# EAGLE board usbmc (EAGLE 4.16)
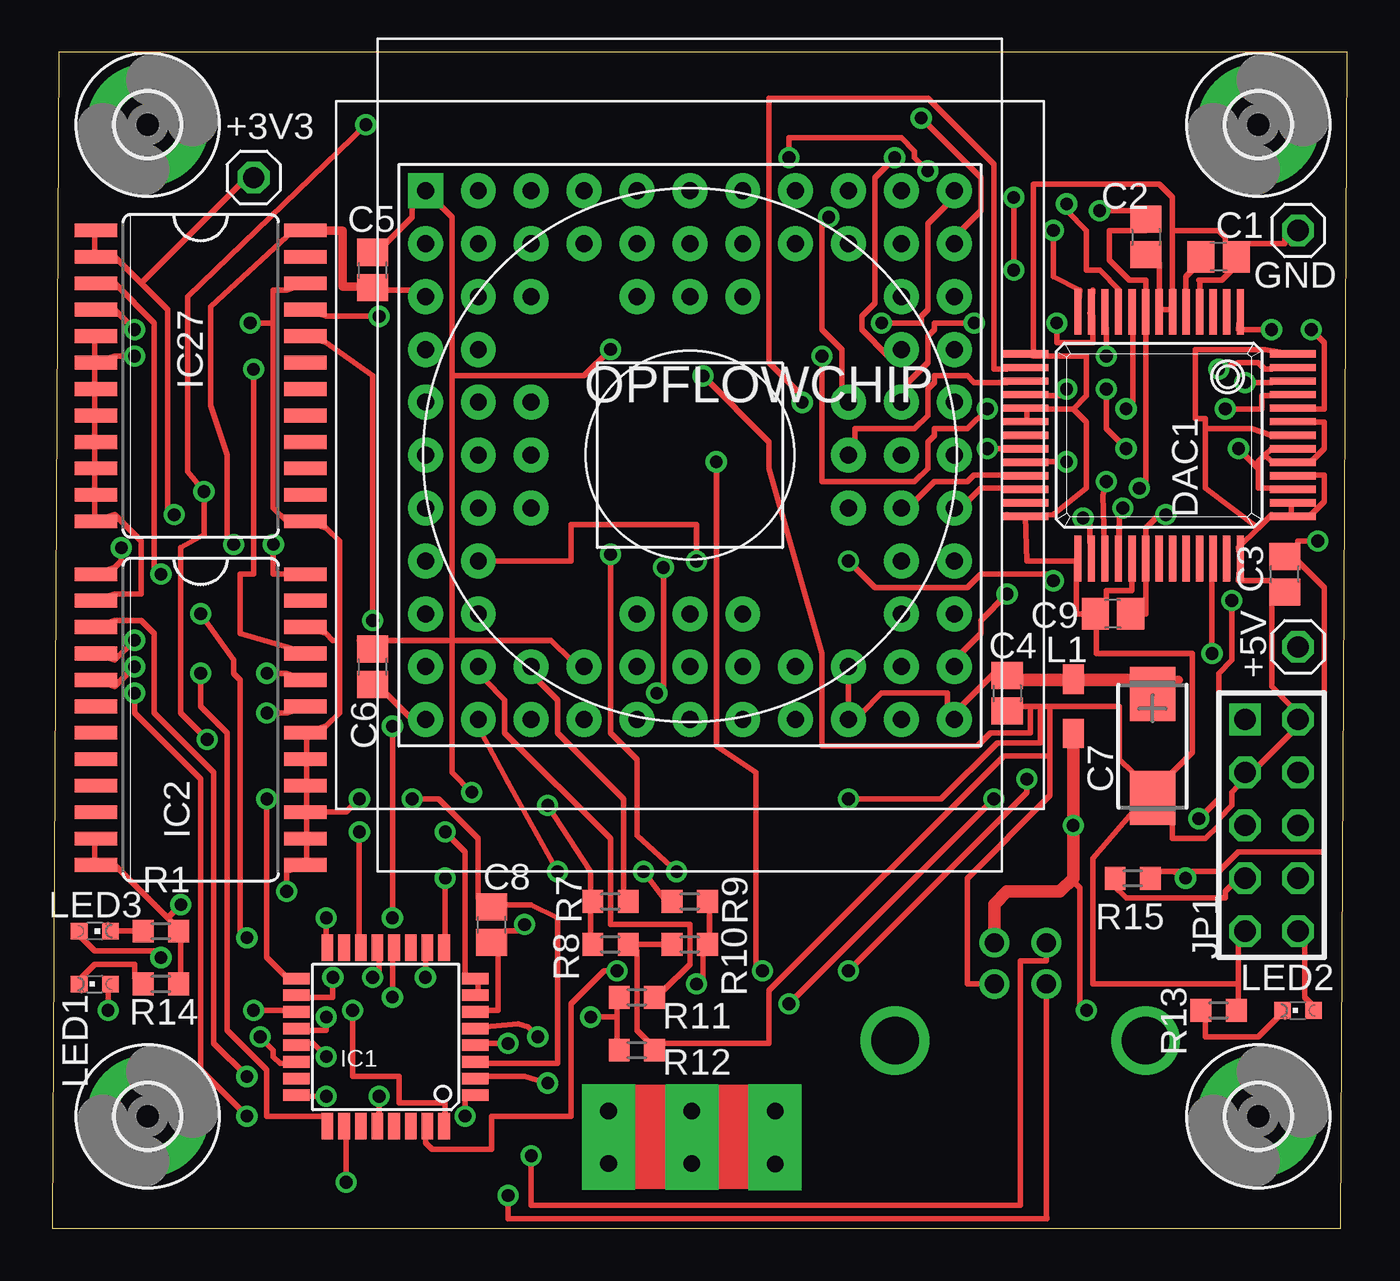
[diagram p0: board, top side]
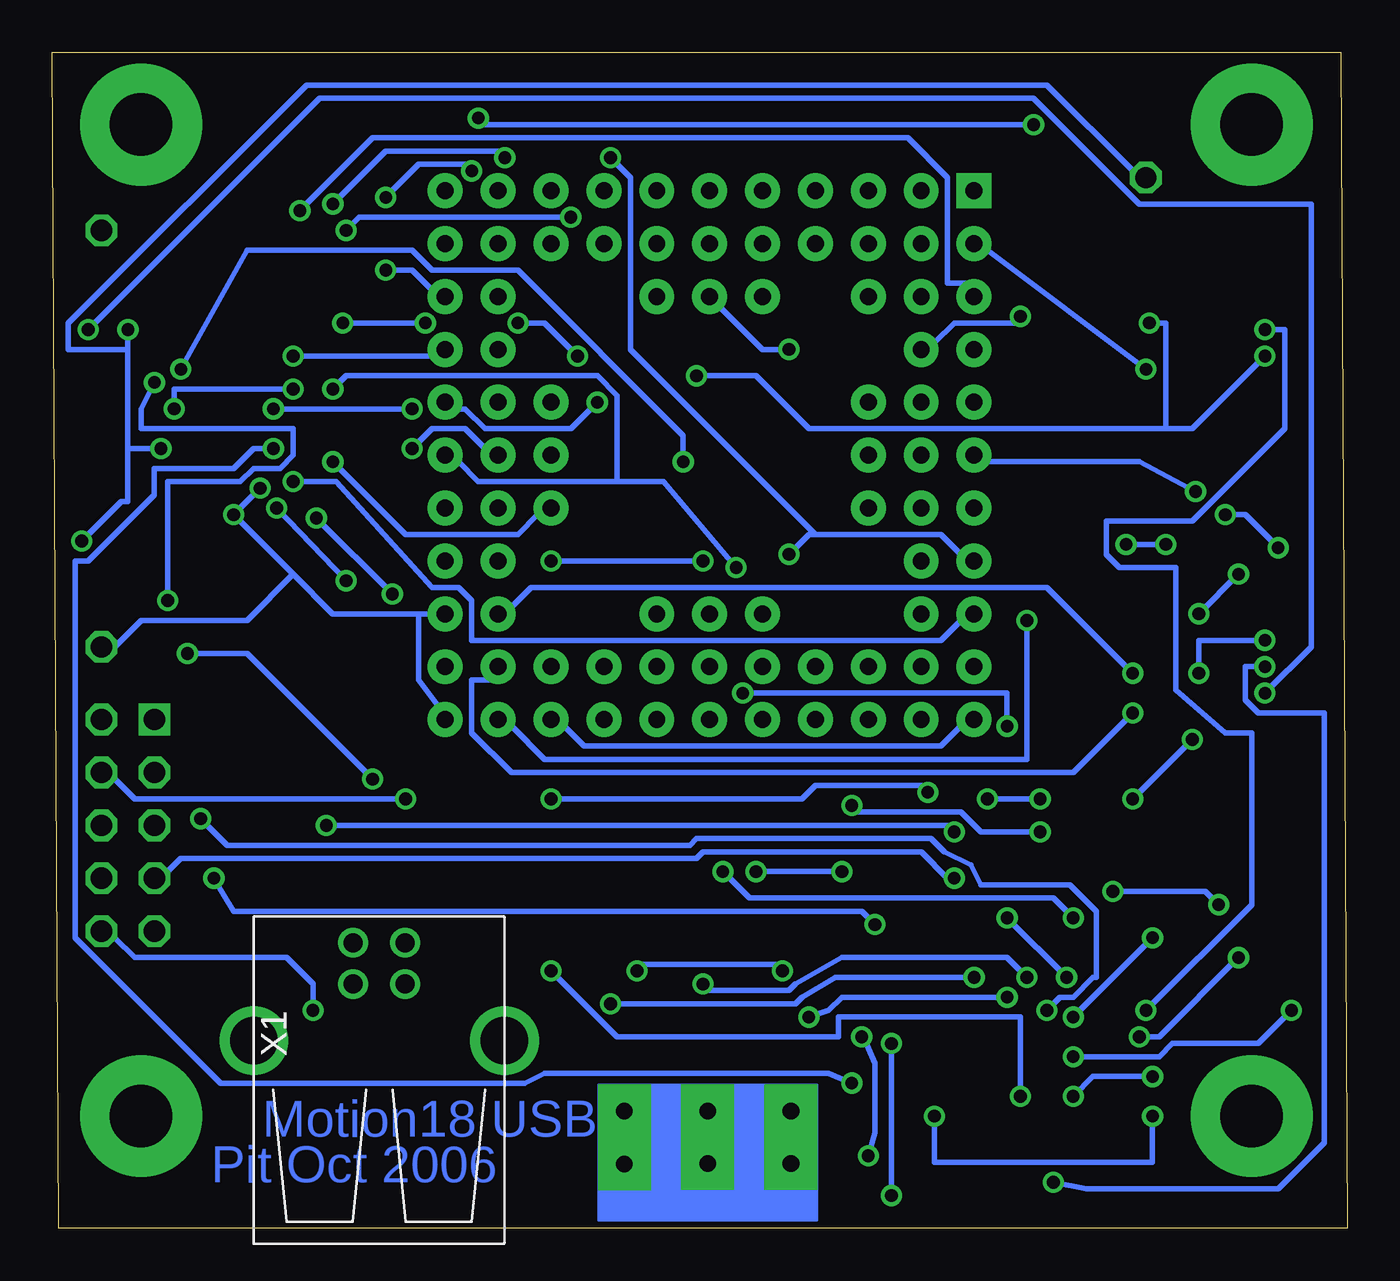
[diagram p1: board, bottom side, seen from below]

Size 62.22 x 56.51 mm. Coordinates in mm from the lower left corner, seen from the top.
Outline: 0,0 61.9,0 62.22,56.51 0.32,56.51 0,0
Copper layers (1*16): Top 0.035mm / dielectric 1.5mm / Bottom 0.035mm
Design rules "default": minimum track width 10mil, minimum drill 24mil, track to track 8mil, track to pad 8mil, pad to pad 8mil, via to via 8mil, smd to smd 8mil, copper to edge 40mil, drill to drill 8mil, minimum pad ring 10mil, minimum via ring 8mil, stop-mask expansion 4mil, vias tented up to drill 0mil, thermal gap 10mil
Net classes: 1 supply: width 0.203 mm, drill 0.152 mm

## Footprints (pad centres in the part's own frame; a part is rotated, then mirrored left to right if it is on the bottom)
1X01 = drill 1.016 octagon: 1 0,0
C0805 = smd 1.3 x 1.5: 1 -0.85,0; 2 0.85,0
CT6032 = smd 2.6 x 2.2: + 2.5,0; - -2.5,0
QFP-52 = smd 0.35 x 2.2: 1 -3.575,-6.25; 2 -2.925,-6.25; 3 -2.275,-6.25; 4 -1.625,-6.25; 5 -0.975,-6.25; 6 -0.325,-6.25; 7 0.325,-6.25; 8 0.975,-6.25; 9 1.625,-6.25; 10 2.275,-6.25; 11 2.925,-6.25; 12 3.575,-6.25; 13 4.225,-6.25; 27 4.225,5.6; 28 3.575,5.6; 29 2.925,5.6; 30 2.275,5.6; 31 1.625,5.6; 32 0.975,5.6; 33 0.325,5.6; 34 -0.325,5.6; 35 -0.975,5.6; 36 -1.625,5.6; 37 -2.275,5.6; 38 -2.925,5.6; 39 -3.575,5.6 | smd 2.2 x 0.35: 14 6.75,-4.225; 15 6.75,-3.575; 16 6.75,-2.925; 17 6.75,-2.275; 18 6.75,-1.625; 19 6.75,-0.975; 20 6.75,-0.325; 21 6.75,0.325; 22 6.75,0.975; 23 6.75,1.625; 24 6.75,2.275; 25 6.75,2.925; 26 6.75,3.575; 40 -6.1,3.575; 41 -6.1,2.925; 42 -6.1,2.275; 43 -6.1,1.625; 44 -6.1,0.975; 45 -6.1,0.325; 46 -6.1,-0.325; 47 -6.1,-0.975; 48 -6.1,-1.625; 49 -6.1,-2.275; 50 -6.1,-2.925; 51 -6.1,-3.575; 52 -6.1,-4.225
3,0-PAD = drill 3 pad 5.842 round: B3,0 0,0
TQFP32-08 = smd 1.27 x 0.559: 1 -4.293,2.8; 2 -4.293,2; 3 -4.293,1.2; 4 -4.293,0.4; 5 -4.293,-0.4; 6 -4.293,-1.2; 7 -4.293,-2; 8 -4.293,-2.8; 17 4.293,-2.8; 18 4.293,-2; 19 4.293,-1.2; 20 4.293,-0.4; 21 4.293,0.4; 22 4.293,1.2; 23 4.293,2; 24 4.293,2.8 | smd 0.559 x 1.27: 9 -2.8,-4.293; 10 -2,-4.293; 11 -1.2,-4.293; 12 -0.4,-4.293; 13 0.4,-4.293; 14 1.2,-4.293; 15 2,-4.293; 16 2.8,-4.293; 25 2.8,4.293; 26 2,4.293; 27 1.2,4.293; 28 0.4,4.293; 29 -0.4,4.293; 30 -1.2,4.293; 31 -2,4.293; 32 -2.8,4.293
SO24W = smd 0.66 x 2.032: 1 -6.985,-5.029; 2 -5.715,-5.029; 3 -4.445,-5.029; 4 -3.175,-5.029; 5 -1.905,-5.029; 6 -0.635,-5.029; 7 0.635,-5.029; 8 1.905,-5.029; 9 3.175,-5.029; 10 4.445,-5.029; 11 5.715,-5.029; 12 6.985,-5.029; 13 6.985,5.029; 14 5.715,5.029; 15 4.445,5.029; 16 3.175,5.029; 17 1.905,5.029; 18 0.635,5.029; 19 -0.635,5.029; 20 -1.905,5.029; 21 -3.175,5.029; 22 -4.445,5.029; 23 -5.715,5.029; 24 -6.985,5.029
AVR-JTAG-10 = drill 1.016 square: 1 -5.08,-1.27 | drill 1.016 octagon: 2 -5.08,1.27; 3 -2.54,-1.27; 4 -2.54,1.27; 5 0,-1.27; 6 0,1.27; 7 2.54,-1.27; 8 2.54,1.27; 9 5.08,-1.27; 10 5.08,1.27
L0805 = smd 1.4 x 1: 1 -1.3,0; 2 1.3,0
CHIPLED_0603 = smd 0.8 x 0.8: A 0,-0.75; C 0,0.75
PGA84 = drill 0.813 pad 1.676 square: A01 -12.7,12.7 | drill 0.813 pad 1.676 round: A02 -10.16,12.7; A03 -7.62,12.7; A04 -5.08,12.7; A05 -2.54,12.7; A06 0,12.7; A07 2.54,12.7; A08 5.08,12.7; A09 7.62,12.7; A10 10.16,12.7; A11 12.7,12.7; B01 -12.7,10.16; B02 -10.16,10.16; B03 -7.62,10.16; B04 -5.08,10.16; B05 -2.54,10.16; B06 0,10.16; B07 2.54,10.16; B08 5.08,10.16; B09 7.62,10.16; B10 10.16,10.16; B11 12.7,10.16; C01 -12.7,7.62; C02 -10.16,7.62; C03 -7.62,7.62; C05 -2.54,7.62; C06 0,7.62; C07 2.54,7.62; C10 10.16,7.62; C11 12.7,7.62; D01 -12.7,5.08; D02 -10.16,5.08; D10 10.16,5.08; D11 12.7,5.08; E01 -12.7,2.54; E02 -10.16,2.54; E03 -7.62,2.54; E09 7.62,2.54; E10 10.16,2.54; E11 12.7,2.54; F01 -12.7,0; F02 -10.16,0; F03 -7.62,0; F09 7.62,0; F10 10.16,0; F11 12.7,0; G01 -12.7,-2.54; G02 -10.16,-2.54; G03 -7.62,-2.54; G09 7.62,-2.54; G10 10.16,-2.54; G11 12.7,-2.54; H01 -12.7,-5.08; H02 -10.16,-5.08; H10 10.16,-5.08; H11 12.7,-5.08; J01 -12.7,-7.62; J02 -10.16,-7.62; J06 -2.54,-7.62; J07 0,-7.62; J08 2.54,-7.62; J10 10.16,-7.62; J11 12.7,-7.62; K01 -12.7,-10.16; K02 -10.16,-10.16; K03 -7.62,-10.16; K04 -5.08,-10.16; K05 -2.54,-10.16; K06 0,-10.16; K07 2.54,-10.16; K08 5.08,-10.16; K09 7.62,-10.16; K10 10.16,-10.16; K11 12.7,-10.16; L01 -12.7,-12.7; L02 -10.16,-12.7; L03 -7.62,-12.7; L04 -5.08,-12.7; L05 -2.54,-12.7; L06 0,-12.7; L07 2.54,-12.7; L08 5.08,-12.7; L09 7.62,-12.7; L10 10.16,-12.7; L11 12.7,-12.7
R0603 = smd 1 x 1.1: 1 -0.85,0; 2 0.85,0
NUT__PAD3 = drill 0.8 pad 2.54 square: P$1 -2,2; P$2 -2,-0.53; P$3 2,2; P$4 2,-0.53; P$5 6,2; P$6 6,-0.55
USB-B-H = drill 0.914 round: D+ 0,1.25; D- 1.981,1.25; GND 0,-1.25; VBUS 1.981,-1.25 | drill 2.286 round: P$1 -2.718,-6.02; P$2 -2.718,6.02

## Placement (x,y rotation side)
+3V3  [1X01]  9.68,50.48 0 top
+5V  [1X01]  59.84,27.93 0 top
C1  100nF  [C0805]  56.03,46.67 180 top
C2  100nF  [C0805]  52.54,47.62 270 top
C3  100nF  [C0805]  59.21,31.43 90 top
C4  100nF  [C0805]  45.87,25.71 270 top
C5  100nF  [C0805]  15.39,46.03 270 top
C6  100nF  [C0805]  15.39,26.98 270 top
C7  10uF  [CT6032]  52.86,23.17 90 top
C8  100nF  [C0805]  21.11,14.6 270 top
C9  100nF  [C0805]  50.95,29.52 180 top
DAC1  AD5391BSTBST  [QFP-52]  53.49,37.78 180 top
GND  [1X01]  59.84,47.94 0 top
H1  MOUNT-PAD-ROUND3.0  [3,0-PAD]  4.6,5.39 0 top
H2  MOUNT-PAD-ROUND3.0  [3,0-PAD]  4.6,53.02 0 top
H3  MOUNT-PAD-ROUND3.0  [3,0-PAD]  57.94,53.02 0 top
H4  MOUNT-PAD-ROUND3.0  [3,0-PAD]  57.94,5.39 0 top
IC1  C8051F320  [TQFP32-08]  16.03,9.2 180 top
IC2  74LVXC3245  [SO24W]  7.14,24.44 270 top
IC27  74LVXC3245  [SO24W]  7.14,40.95 270 top
JP1  AVR-JTAG-10  [AVR-JTAG-10]  58.57,19.36 270 top
L1  330Z  [L0805]  49.05,25.08 90 top
LED1  red  [CHIPLED_0603]  2.06,11.74 90 top
LED2  red  [CHIPLED_0603]  59.84,10.47 90 top
LED3  red  [CHIPLED_0603]  2.06,14.28 270 top
OPFLOWCHIP  MOTION18PGA84  [PGA84]  30.63,37.14 0 top
R1  180R  [R0603]  5.23,14.28 0 top
R7  4.7k  [R0603]  26.82,15.71 0 top
R8  4.7k  [R0603]  26.82,13.65 180 top
R9  4.7k  [R0603]  30.63,15.71 180 top
R10  4.7k  [R0603]  30.63,13.65 0 top
R11  4.7k  [R0603]  28.09,11.11 0 top
R12  4.7k  [R0603]  28.09,8.57 180 top
R13  270R  [R0603]  56.03,10.47 0 top
R14  180R  [R0603]  5.23,11.74 0 top
R15  1k  [R0603]  51.91,16.82 180 top
U$2  LENSMOUNTS  [LENSMOUNTS]  30.63,37.14 0 top
U$3  NUTPAD3  [NUT__PAD3]  28.73,3.65 0 top
X1  USB-B-H  [USB-B-H]  46.51,11.74 90 bottom

## Library data of the parts
+3V3 +5V GND = pinhead
C1-C9 R1 R7-R15 = rcl
DAC1 JP1 U$2 U$3 = usbmc
H1-H4 = holes
IC1 = silabs-2
IC2 IC27 = gd_transceiver
L1 = MoNC
LED1-LED3 = led
OPFLOWCHIP = alanLib
X1 = con-usb

## Nets
+3V3: +3V3.1 C3.2 C8.2 DAC1.1 DAC1.42 DAC1.44 DAC1.45 DAC1.47 IC1.6 IC2.1 IC27.1 IC27.2 R15.1
+5V: +5V.1 C2.1 C4.1 C5.2 C6.2 C7.+ C9.1 DAC1.8 DAC1.32 IC2.24 IC27.24 L1.2 OPFLOWCHIP.C01 OPFLOWCHIP.J11 OPFLOWCHIP.K09 OPFLOWCHIP.L01 OPFLOWCHIP.L09 OPFLOWCHIP.L11
B+: IC1.4 X1.D+
B-: IC1.5 X1.D-
CLK_H: IC27.20 OPFLOWCHIP.L10
CLK_H33: IC1.19 IC27.4
CLK_V: IC27.21 OPFLOWCHIP.D02
CLK_V33: IC1.20 IC27.3
FBIAS: DAC1.9 OPFLOWCHIP.A11
GND: C1.1 C2.2 C3.1 C4.2 C5.1 C6.1 C7.- C8.1 C9.2 DAC1.4 DAC1.6 DAC1.7 DAC1.14 DAC1.18 DAC1.19 DAC1.26 DAC1.27 DAC1.31 DAC1.39 DAC1.40 DAC1.41 DAC1.43 DAC1.46 DAC1.52 GND.1 IC1.3 IC2.2 IC2.11 IC2.12 IC2.13 IC2.14 IC2.15 IC2.16 IC2.17 IC2.18 IC2.22 IC27.5 IC27.6 IC27.7 IC27.8 IC27.9 IC27.10 IC27.11 IC27.12 IC27.13 IC27.22 JP1.2 JP1.3 JP1.9 OPFLOWCHIP.A01 OPFLOWCHIP.C06 OPFLOWCHIP.K04 R1.2 R8.1 R10.1 R12.1 R13.2 R14.2 X1.GND
HDBIAS: DAC1.16 OPFLOWCHIP.F09
HDT+: DAC1.10 OPFLOWCHIP.D10
HDT-: DAC1.11 OPFLOWCHIP.D11
HRES: DAC1.21 OPFLOWCHIP.F10
HSYNC: IC2.19 OPFLOWCHIP.K10
HSYNC33: IC1.26 IC2.5
MISO: DAC1.48 IC1.1
MOSI: DAC1.50 IC1.32
N$1: IC1.14 R7.1 R8.2
N$2: IC1.13 R9.1 R10.2
N$3: IC1.12 R11.1 R12.2
N$5: LED3.C R1.1
N$7: IC1.22 LED3.A
N$8: IC1.21 LED1.A
N$9: LED2.C R13.1
N$10: IC1.10 JP1.4
N$11: IC1.9 JP1.7 R15.2
N$42: LED1.C R14.1
NOTRESET: DAC1.37 IC1.28
NSCFBIAS: DAC1.28 OPFLOWCHIP.K11
NSS: DAC1.51 IC1.31
OPBIAS: DAC1.23 OPFLOWCHIP.G10
OR_H: IC2.20 OPFLOWCHIP.J10
OR_H33: IC1.25 IC2.4
PDBIAS: DAC1.30 OPFLOWCHIP.H02
PHABIAS: DAC1.12 OPFLOWCHIP.E10
PHBIAS: DAC1.13 OPFLOWCHIP.E09
PHFBIAS: DAC1.15 OPFLOWCHIP.E11
PSCFBIAS: DAC1.29 OPFLOWCHIP.J01
REF: C1.2 DAC1.5
S_PH0: OPFLOWCHIP.L02 R9.2
S_VX+: OPFLOWCHIP.K03 R7.2
S_VY+: OPFLOWCHIP.K02 R11.2
SCK: DAC1.49 IC1.2
V-: DAC1.17 IC1.18 OPFLOWCHIP.F11
VSYNC: IC2.21 OPFLOWCHIP.B01
VSYNC33: IC1.24 IC2.3
VUSB: IC1.7 IC1.8 JP1.10 L1.1 LED2.A X1.VBUS
VVI1: DAC1.24 OPFLOWCHIP.G11
VVI2: DAC1.22 OPFLOWCHIP.G09
VX+B: IC1.17 OPFLOWCHIP.B11 OPFLOWCHIP.F01
VY+B: IC1.16 OPFLOWCHIP.C11 OPFLOWCHIP.H01

## Tracks (layer width: path | path; a pad name or v marks a point on that pad's centre or on a via)
+3V3  (via drill 0.61)
  Top 0.254: v3.33,32.7 3.33,32.06 3.01,31.75 IC2.1 | v5.87,34.29 5.55,34.6 5.55,44.13 4.28,45.4 | 4.28,45.4 3.01,46.67 IC27.2 2.06,46.99 2.06,47.62 IC27.1 | 4.28,45.4 9.04,50.16 +3V3.1 | 57.94,36.51 57.94,36.82 58.26,37.14 | 57.94,36.51 57.94,35.56 58.57,35.56 DAC1.42 | 58.26,37.14 58.57,37.46 DAC1.45 | 58.26,37.14 58.57,36.82 DAC1.44 60.48,36.82 61.11,37.46 61.11,38.73 60.48,38.73 DAC1.47 | v58.57,43.18 56.98,43.18 DAC1.1 | v56.98,37.46 57.94,36.51 | IC1.6 20.79,10.47 21.43,10.47 21.43,13.33 C8.2 21.74,14.28 22.69,14.28 v22.69,14.6 | 53.81,17.14 56.03,17.14 56.98,18.09 61.11,18.09 61.11,30.79 59.84,32.06 C3.2 59.84,32.7 59.84,33.01 v60.8,33.01 | 53.81,17.14 52.86,17.14 R15.1 | v54.44,16.82 53.81,17.14
  Bottom 0.254: v3.33,32.7 4.91,34.29 v5.87,34.29 | 58.57,37.46 58.57,42.22 | 58.57,42.22 v58.57,43.18 | 58.57,37.46 v56.98,37.46 | v22.69,14.6 23.33,15.23 53.49,15.23 v54.44,16.82 | 58.57,37.46 58.57,34.92 58.89,34.92 v60.8,33.01 | 58.57,42.22 61.43,42.22 61.43,43.49 50,54.92 14.44,54.92 10.31,50.79 +3V3.1
+5V  (via drill 0.61)
  Top 0.254: OPFLOWCHIP.K09 OPFLOWCHIP.L09 38.89,24.76 39.84,25.71 43.02,25.71 43.02,25.08 OPFLOWCHIP.L11 43.65,25.08 45.24,26.67 C4.1 | v53.49,34.29 53.17,34.29 52.54,33.65 52.54,33.01 DAC1.32 52.52,32.2 52.54,32.22 52.54,29.52 C9.1 | v52.22,35.56 52.54,35.87 52.54,43.18 DAC1.8 52.52,43.99 52.54,43.97 52.54,45.56 51.75,45.56 50.79,46.51 50.79,47.94 52.54,47.94 C2.1 51.91,48.89 v50.32,48.89 | OPFLOWCHIP.L01 17.3,24.44 16.03,25.71 C6.2 16.03,26.67 | C5.2 16.03,45.08 17.3,45.08 OPFLOWCHIP.C01 | IC2.24 10.63,31.43 v10.63,32.86 | v8.72,32.86 8.41,33.17 8.41,37.14 7.61,39.52 7.61,44.29 11.58,47.94 12.22,47.94
  Top 0.406: 52.86,26.35 54.13,26.35 | IC27.24 12.22,47.94 13.96,47.94 13.96,45.24 15.39,45.24 | 15.39,45.24 C5.2 | 15.39,45.24 15.39,45.4
  Top 0.61: 49.05,26.35 52.86,26.35 C7.+ | C4.1 45.87,26.35 49.05,26.35 | 49.05,26.35 L1.2
  Bottom 0.254: 50.63,31.43 48.73,29.52 44.6,29.52 | 50.63,31.43 v53.49,34.29 v52.22,35.56 | 44.6,29.52 OPFLOWCHIP.J11 | 50.63,31.43 52.86,29.21 57.94,29.21 59.21,27.93 +5V.1 | OPFLOWCHIP.L11 43.65,25.08 44.6,26.35 44.6,29.52 | v50.32,48.89 46.83,52.38 21.11,52.38 19.2,50.48 19.2,45.4 18.25,45.4 OPFLOWCHIP.C01 | OPFLOWCHIP.L09 37.62,24.12 36.66,23.17 19.52,23.17 18.57,24.12 OPFLOWCHIP.L01 | v8.72,32.86 v10.63,32.86
B+  (via drill 0.61)
  Top 0.254: v21.9,8.89 19.84,8.89 IC1.4 | X1.D+ 47.76,0.65 47.78,0.47 21.9,0.47 v21.9,1.58
  Bottom 0.254: v21.9,1.58 v21.9,8.89
B-  (via drill 0.61)
  Top 0.254: 20.79,9.52 IC1.5 20.8,9.68 | X1.D- 47.76,12.85 46.51,12.85 46.51,1.11 23.01,1.11 v23.01,3.49 | 20.8,9.68 20.47,9.52 | v23.33,9.2 22.85,9.68 22.38,9.84 20.8,9.68
  Bottom 0.254: v23.01,3.49 22.69,4.6 22.69,7.93 23.33,9.36 v23.33,9.2
CLK_H  (via drill 0.61)
  Top 0.254: v15.39,29.21 15.39,40.95 13.17,42.54 IC27.20
  Bottom 0.254: v15.39,29.21 15.39,22.54 38.57,22.54 40.16,24.12 OPFLOWCHIP.L10
CLK_H33  (via drill 0.61)
  Top 0.254: v9.68,10.47 11.27,10.47 IC1.19 | v3.96,43.18 3.01,44.13 IC27.4
  Bottom 0.254: v9.68,10.47 4.6,15.55 4.6,23.81 5.87,23.81 8.25,25.87 8.25,31.75 10.95,31.75 11.58,32.38 11.58,33.97 7.45,33.97 3.01,38.41 3.01,43.18 v3.96,43.18
CLK_V  (via drill 0.61)
  Top 0.254: v15.71,43.81 13.17,43.81 IC27.21
  Bottom 0.254: v15.71,43.81 16.03,43.49 18.89,43.49 19.84,42.54 OPFLOWCHIP.D02
CLK_V33  (via drill 0.61)
  Top 0.254: v13.17,10.16 13.17,9.52 12.22,9.52 IC1.20 | v9.36,13.96 9.04,14.28 9.04,26.35 8.72,26.67 8.72,27.3 v7.14,29.52 | v5.23,31.43 4.91,31.75 4.91,43.49 3.01,45.4 IC27.3
  Bottom 0.254: v13.17,10.16 v9.36,13.96 | v7.14,29.52 v5.23,31.43
FBIAS  (via drill 0.61)
  Top 0.254: v51.59,39.36 51.91,39.68 51.91,43.18 DAC1.9 | v44.92,39.36 43.97,38.41 42.38,38.41 42.38,38.1 42.06,37.78 42.06,36.51 41.43,35.87 36.98,35.87 v36.98,41.9 | v39.84,43.49 41.74,43.49 41.74,43.81 42.06,44.13 42.06,48.25 43.02,49.21 OPFLOWCHIP.A11
  Bottom 0.254: v44.92,39.36 v51.59,39.36 | v36.98,41.9 38.57,43.49 v39.84,43.49
GND  (via drill 0.61)
  Top 0.254: IC1.3 20.79,7.93 24.28,7.93 24.28,14.92 23.01,15.55 21.74,15.55 C8.1 20.47,15.87 20.47,18.73 18.57,20.63 v17.3,20.63 | 19.2,28.25 23.96,28.25 24.92,27.3 OPFLOWCHIP.K04 | 19.2,28.25 19.2,21.9 v20.16,20.95 | IC27.6 2.06,41.27 2.06,40.64 IC27.7 2.06,40 2.06,39.36 IC27.8 2.06,38.73 2.06,38.1 IC27.9 2.06,37.46 2.06,36.82 IC27.10 2.06,36.19 2.06,35.56 IC27.11 2.06,34.92 2.06,34.29 IC27.12 3.01,34.29 4.28,33.01 4.28,30.47 3.01,30.47 IC2.2 | IC27.5 2.06,42.54 2.06,41.9 IC27.6 | C5.1 16.03,47.3 17.3,48.57 17.3,49.21 OPFLOWCHIP.A01 19.2,48.57 19.2,40.95 | R14.2 6.19,12.06 6.19,13.96 R1.2 5.87,14.6 5.55,14.92 | 5.55,14.92 3.01,17.46 IC2.12 2.06,17.77 2.06,18.41 IC2.11 | IC2.15 12.22,20.32 12.22,20.95 IC2.16 12.22,21.59 12.22,22.22 IC2.17 12.22,22.86 12.22,23.49 IC2.18 13.17,24.12 13.8,24.76 13.8,28.25 | IC2.15 12.22,19.68 12.22,19.04 IC2.14 12.22,18.41 12.22,17.77 IC2.13 11.27,17.14 v11.27,16.19 | 13.8,28.25 13.49,28.25 13.17,28.57 IC2.22 | C6.1 14.76,28.25 19.2,28.25 | 13.8,28.25 13.8,33.01 13.17,33.65 IC27.13 11.27,33.97 10.63,34.6 10.63,43.49 | 5.55,14.92 v6.19,15.55 | 10.63,43.49 10.63,45.08 11.27,45.08 IC27.22 | v3.96,41.9 3.01,41.9 IC27.6 | 19.2,28.25 19.2,40.95 | C1.1 57.3,47.3 59.21,47.3 59.21,47.62 GND.1 59.52,47.3 | C2.2 53.17,46.35 53.17,45.08 DAC1.7 | 51.91,33.01 DAC1.31 51.87,30.63 50.63,30.63 50.63,30 50.48,30 50.48,29.52 C9.2 | DAC1.7 53.17,43.18 | DAC1.7 53.17,44.13 53.81,44.13 DAC1.6 53.81,45.08 53.81,47.94 | 53.81,47.94 56.03,47.94 56.35,47.62 56.35,47.3 C1.1 | DAC1.19 46.83,38.73 46.83,39.36 DAC1.18 47.78,39.36 49.05,39.36 | 47.14,41.9 49.68,41.9 49.68,40 49.05,39.36
  Top 0.254: DAC1.26 45.87,34.29 | 49.05,39.36 49.68,38.73 49.68,35.56 48.09,34.29 DAC1.26 | 53.81,47.94 53.81,49.53 53.17,50.16 47.14,50.16 47.14,41.9 | 47.14,41.9 DAC1.14 | DAC1.40 59.52,34.29 59.52,34.92 DAC1.41 | DAC1.43 60.48,36.19 61.11,36.19 61.11,34.92 60.48,34.29 DAC1.40 | 57.94,33.65 56.98,32.7 DAC1.39 56.98,31.11 58.57,31.11 C3.1 58.57,30.16 58.57,26.03 59.52,25.08 JP1.2 59.52,23.81 57.94,22.22 JP1.3 56.98,21.27 56.67,20.95 56.67,20.32 56.03,19.68 56.03,19.36 55.4,18.73 53.81,18.73 53.81,19.68 C7.- | 57.94,33.65 58.57,34.29 DAC1.40 | 55.4,38.41 57.62,38.41 58.57,38.1 DAC1.46 | 55.08,43.18 DAC1.4 55.12,45.52 55.08,45.56 56.19,45.56 56.88,46.25 C1.1 | 57.94,33.65 55.4,35.56 55.4,38.41 | 56.98,11.74 56.98,13.65 JP1.9 | 56.98,11.74 56.98,10.79 R13.2 | 56.98,11.74 50,11.74 50,17.77 51.91,20 C7.- | R10.1 R8.1 28.09,13.33 28.09,9.52 28.73,8.89 R12.1 29.36,8.89 34.44,8.89 34.44,11.43 45.71,22.7 47.94,22.7 | 47.94,25.08 51.27,25.08 51.27,22.54 51.91,21.9 C7.- | 47.46,25.08 47.94,25.08 | 46.98,25.08 47.46,25.08 | 46.98,25.08 46.51,25.08 C4.2 45.71,24.76 | C7.- 53.81,21.9 54.76,22.86 54.76,27.62 50.16,27.62 50.16,29.52 C9.2 | v14.76,20.63 14.12,20 IC2.15 | v31.27,40.95 34.44,37.78 34.44,36.51 36.98,27.62 36.98,23.17 44.44,23.17 45.08,23.81 46.98,23.81 46.98,25.08 | 19.2,40.95 25.55,40.95 v26.82,42.22 | C9.2 49.21,29.52 49.21,32.06 | DAC1.52 58.26,42.22 54.92,42.22 54.92,38.89 55.4,38.89 55.4,38.41 | DAC1.26 46.83,32.06 49.21,32.06 | 10.63,43.49 v9.52,43.49 | v38.25,20.63 42.7,20.63 45.4,23.33 47.46,23.33 47.46,25.08 | 47.94,25.08 47.94,22.7 | 49.21,32.06 49.05,32.06 DAC1.27 | X1.GND 43.97,11.74 43.97,16.82 47.94,20.79 47.94,22.06 47.94,22.86 47.94,22.7
  Bottom 0.254: v6.19,15.55 6.82,16.19 v11.27,16.19 | OPFLOWCHIP.A01 17.3,49.21 | 8.72,38.41 7.45,38.41 v3.96,41.9 | v38.25,20.63 26.19,20.63 25.55,21.27 20.47,21.27 v20.16,20.95 | v14.76,20.63 v17.3,20.63 | v31.27,40.95 28.41,40.95 25.87,38.41 8.72,38.41 | OPFLOWCHIP.C06 28.09,42.22 v26.82,42.22 | 8.72,38.41 8.72,43.49 v9.52,43.49
HDBIAS
  Top 0.254: DAC1.16 45.87,40.64 44.29,40.64 43.97,40.95 42.38,40.95 42.38,40.64 42.06,40.32 42.06,39.05 41.43,38.41 38.57,38.41 38.57,37.78 OPFLOWCHIP.F09
HDT+  (via drill 0.61)
  Top 0.254: v40.48,51.43 39.52,50.48 39.52,44.44 38.89,43.81 38.89,43.18 40.16,41.9 OPFLOWCHIP.D10 | DAC1.10 51.27,45.08 50.32,46.03 49.68,46.03 49.68,47.94 48.73,48.89 v48.73,49.21
  Bottom 0.254: v48.73,49.21 46.19,51.75 40.79,51.75 v40.48,51.43
HDT-  (via drill 0.61)
  Top 0.254: v50.63,41.9 50.63,43.18 DAC1.11
  Bottom 0.254: v50.63,41.9 43.97,41.9 OPFLOWCHIP.D11
HRES  (via drill 0.61)
  Top 0.254: v44.92,37.46 45.87,37.46 DAC1.21
  Bottom 0.254: v44.92,37.46 43.97,38.41 42.38,38.41 41.43,37.46 OPFLOWCHIP.F10
HSYNC  (via drill 0.61)
  Top 0.254: v10.31,24.76 11.27,24.76 IC2.19
  Bottom 0.254: v10.31,24.76 13.17,21.9 40.16,21.9 42.06,23.81 42.06,26.35 41.11,26.35 OPFLOWCHIP.K10
HSYNC33  (via drill 0.61)
  Top 0.254: v14.12,2.22 14.12,4.44 IC1.26 | v3.96,26.98 3.01,26.03 IC2.5
  Bottom 0.254: v14.12,2.22 12.53,1.9 3.33,1.9 1.11,4.12 1.11,24.76 4.28,24.76 4.91,25.39 4.91,26.98 v3.96,26.98
MISO  (via drill 0.61)
  Top 0.254: v19.84,5.39 19.84,6.34 IC1.1 | v9.36,5.39 7.14,7.61 7.14,21.59 3.96,24.76 v3.96,25.71 | v60.48,43.18 61.11,42.54 61.11,39.36 60.48,39.36 DAC1.48
  Bottom 0.254: v9.36,5.39 9.36,3.17 19.84,3.17 v19.84,5.39 | v3.96,25.71 1.74,27.93 1.74,49.21 10,49.21 15.07,54.29 49.37,54.29 v60.48,43.18
MOSI  (via drill 0.61)
  Top 0.254: v14.44,10.47 14.44,7.3 16.66,7.3 16.66,6.03 18.89,6.03 18.89,5.39 IC1.32 | v55.08,19.68 56.03,20.63 56.03,26.67 56.67,27.3 v56.67,30.16 | DAC1.50 58.57,40.64 v57.3,40.64
  Bottom 0.254: v14.44,10.47 13.8,11.11 13.17,11.11 12.22,12.06 12.06,12.06 12.06,15.23 13.33,16.5 17.62,16.5 18.09,17.46 19.36,18.09 20,18.73 31.27,18.73 31.59,18.41 53.81,18.41 v55.08,19.68 | v56.67,30.16 56.67,35.87 53.17,35.87 52.54,36.51 51.27,36.51 50.63,37.14 50.63,38.41 57.94,38.41 57.94,39.36 v57.3,40.64
N$1  (via drill 0.61)
  Top 0.254: R8.2 25.87,13.96 25.87,15.23 R7.1 25.87,15.87 25.87,17.14 v23.81,20.32 | v14.76,19.04 14.76,13.96 IC1.14
  Bottom 0.254: v23.81,20.32 23.49,20 18.57,20 17.62,19.04 v14.76,19.04
N$2  (via drill 0.61)
  Top 0.254: R9.1 31.59,15.23 31.59,13.96 R10.2 31.27,13.33 31.27,12.06 v30.95,11.74 | v15.39,12.06 15.71,12.38 15.71,13.01 IC1.13
  Bottom 0.254: v15.39,12.06 16.34,13.01 24.28,13.01 26.5,11.74 26.82,11.43 30.63,11.43 v30.95,11.74
N$3  (via drill 0.61)
  Top 0.254: 27.14,10.16 27.14,10.79 R11.1 | 27.14,10.16 27.14,8.89 R12.2 | v16.34,11.11 16.34,13.01 IC1.12 | v25.87,10.16 27.14,10.16
  Bottom 0.254: v16.34,11.11 24.28,11.11 24.92,10.47 v25.87,10.16
N$5
  Top 0.254: LED3.C R1.1
N$7  (via drill 0.61)
  Top 0.254: v5.23,13.01 5.23,13.33 2.06,13.33 1.42,13.96 LED3.A | v10,9.2 10.63,8.57 10.63,8.25 10.95,7.93 11.27,7.93 IC1.22
  Bottom 0.254: v5.23,13.01 9.04,9.2 v10,9.2
N$8  (via drill 0.61)
  Top 0.254: v2.69,10.47 2.69,11.43 LED1.A | v13.17,8.25 12.53,8.89 12.22,8.89 IC1.21
  Bottom 0.254: v2.69,10.47 4.28,8.89 8.41,8.89 9.04,8.25 v13.17,8.25
N$9
  Top 0.254: LED2.C 58.89,10.16 57.94,9.2 55.4,9.2 55.4,10.16 R13.1
N$10  (via drill 0.61)
  Top 0.254: v17.93,12.06 17.93,13.01 IC1.10 | v35.4,10.79 v45.24,20.63
  Bottom 0.254: v17.93,12.06 24.6,12.06 26.19,11.11 26.5,10.79 v35.4,10.79 | v45.24,20.63 58.26,20.63 59.21,21.59 JP1.4
N$11  (via drill 0.61)
  Top 0.254: R15.2 50.95,16.5 51.59,15.87 56.35,15.87 56.35,16.19 56.67,16.5 JP1.7 | v18.89,16.82 18.89,13.96 IC1.9
  Bottom 0.254: JP1.7 56.67,17.14 56.03,17.77 31.27,17.77 30.95,18.09 20.47,18.09 19.2,16.82 v18.89,16.82
N$42
  Top 0.254: LED1.C 1.42,12.06 2.06,12.7 3.96,12.7 3.96,12.06 R14.1
NOTRESET  (via drill 0.61)
  Top 0.254: v15.71,6.34 15.71,5.39 IC1.28 | v38.25,12.38 46.83,20.95 v46.83,21.59 | v55.72,27.62 55.72,31.11 DAC1.37
  Bottom 0.254: v38.25,12.38 35.08,9.2 24.44,9.2 24.44,10.16 15.71,10.16 v15.71,6.34 | v46.83,21.59 52.86,27.62 v55.72,27.62
NSCFBIAS  (via drill 0.61)
  Top 0.254: v49.52,34.13 49.84,33.97 49.84,33.01 DAC1.28 | v45.87,30.47 44.6,29.21 44.6,28.57 43.65,27.62 OPFLOWCHIP.K11
  Bottom 0.254: v45.87,30.47 v49.52,34.13
NSS  (via drill 0.61)
  Top 0.254: v27.14,12.38 26.5,12.38 24.92,10.79 24.92,5.39 21.11,5.39 21.11,3.8 18.25,3.8 17.93,4.12 17.93,4.44 IC1.31 | v34.12,12.38 33.81,12.7 33.81,21.9 31.9,23.17 v31.9,36.82 | v56.03,41.27 56.98,41.59 57.94,41.59 58.26,41.27 58.57,41.27 DAC1.51
  Bottom 0.254: v27.14,12.38 27.46,12.7 33.81,12.7 v34.12,12.38 | v31.9,36.82 31.9,38.1 39.84,46.03 43.97,46.03 44.92,46.99 52.86,46.99 v56.03,41.27
OPBIAS
  Top 0.254: DAC1.23 45.87,36.19 44.29,36.19 43.97,35.87 42.38,35.87 41.43,34.92 OPFLOWCHIP.G10
OR_H  (via drill 0.61)
  Top 0.254: v10.31,26.67 11.27,26.67 IC2.20
  Bottom 0.254: v10.31,26.67 14.44,30.79 39.2,30.79 40.16,29.84 OPFLOWCHIP.J10
OR_H33  (via drill 0.61)
  Top 0.254: v3.96,28.25 3.01,27.3 IC2.4 | IC1.25 13.17,5.39 10.31,5.39 10.31,7.61 8.41,9.52 8.41,23.81 7.14,25.08 v7.14,26.67 7.14,26.98
  Bottom 0.254: v7.14,26.67 7.14,28.25 v3.96,28.25
PDBIAS  (via drill 0.61)
  Top 0.254: OPFLOWCHIP.H02 24.92,32.06 24.92,33.81 30.95,33.81 v30.95,32.06 | v38.25,32.06 39.52,30.79 43.97,30.79 44.6,31.43 47.78,31.43 v48.09,31.11 | 51.27,34.35 51.27,32.06 | 51.27,34.35 DAC1.30 | v51.43,34.6 51.27,34.35
  Bottom 0.254: v30.95,32.06 v38.25,32.06 | v48.09,31.11 v51.43,34.6
PHABIAS  (via drill 0.61)
  Top 0.254: v44.29,43.49 42.38,43.49 42.38,43.18 42.06,42.86 42.06,41.59 41.11,40.64 41.11,40.32 OPFLOWCHIP.E10 | 50,45.08 DAC1.12 49.9,44.03 49.84,43.97 50,43.81 50,42.54 48.25,42.54 v48.25,43.49
  Bottom 0.254: v44.29,43.49 v48.25,43.49
PHBIAS  (via drill 0.61)
  Top 0.254: v48.09,47.94 48.09,45.71 49.37,45.08 DAC1.13 | v37.3,48.57 36.98,48.25 36.98,43.18 37.94,42.22 37.94,40.32 OPFLOWCHIP.E09
  Bottom 0.254: v48.09,47.94 47.46,48.57 v37.3,48.57
PHFBIAS  (via drill 0.61)
  Top 0.254: v36.03,39.68 36.03,40 34.44,41.59 34.44,54.29 42.06,54.29 45.24,51.11 45.24,41.27 45.87,41.27 DAC1.15
  Bottom 0.254: v36.03,39.68 37.3,38.41 41.43,38.41 42.38,39.36 42.7,39.36 OPFLOWCHIP.E11
PSCFBIAS  (via drill 0.61)
  Top 0.254: v50.63,35.87 50.48,35.24 DAC1.29
  Bottom 0.254: v50.63,35.87 48.57,35.87 43.97,30.79 42.7,30.79 42.06,30.16 42.06,28.25 19.52,28.25 18.57,29.21 OPFLOWCHIP.J01
REF
  Top 0.254: C1.2 54.76,46.03 54.44,45.71 54.44,45.08 DAC1.5
S_PH0  (via drill 0.61)
  Top 0.254: v28.41,17.14 29.36,15.87 R9.2 | v24.28,17.14 21.9,21.43 20.63,23.81 OPFLOWCHIP.L02
  Bottom 0.254: v24.28,17.14 v28.41,17.14
S_VX+
  Top 0.254: R7.2 27.46,15.87 27.46,20.63 24.28,23.81 24.28,25.39 23.33,26.35 OPFLOWCHIP.K03
S_VY+
  Top 0.254: R11.2 29.36,11.43 30.63,12.7 30.63,14.6 26.82,14.6 26.82,18.73 21.74,23.81 21.74,25.39 20.79,26.35 OPFLOWCHIP.K02
SCK  (via drill 0.61)
  Top 0.254: v23.81,6.98 22.69,7.3 20.79,7.3 IC1.2 | v51.59,37.46 50.63,38.41 v50.63,40.32 | DAC1.49 58.57,40 58.1,40 58.1,39.36 v56.35,39.36
  Bottom 0.254: v23.81,6.98 24.92,7.46 38.57,7.46 39.52,6.98 54.13,6.98 61.11,13.96 61.11,32.06 60.48,32.06 57.3,35.24 57.3,36.51 53.49,36.51 52.54,37.46 v51.59,37.46 | v50.63,40.32 56.35,40.32 v56.35,39.36
V-  (via drill 0.61)
  Top 0.254: v13.49,12.06 13.49,11.11 12.22,11.11 IC1.18 | v16.34,14.92 v16.34,24.12 | v29.05,25.71 29.36,26.03 v29.36,31.75 | v48.73,40.32 48.73,40 47.78,40 DAC1.17
  Bottom 0.254: v13.49,12.06 v16.34,14.92 | v16.34,24.12 16.34,25.71 v29.05,25.71 | v29.36,31.75 32.85,35.87 35.08,35.87 | 35.08,35.87 41.74,35.87 42.7,36.82 OPFLOWCHIP.F11 | v48.73,40.32 48.09,40.95 36.03,40.95 35.08,40 35.08,35.87
VSYNC  (via drill 0.61)
  Top 0.254: IC2.21 11.27,27.93 9.04,28.57 9.04,31.43 9.68,31.43 v9.68,41.27
  Bottom 0.254: v9.68,41.27 17.3,46.99 OPFLOWCHIP.B01
VSYNC33  (via drill 0.61)
  Top 0.254: v13.17,6.34 12.22,6.34 IC1.24 | v9.36,7.3 7.77,8.89 7.77,21.9 4.91,24.76 4.91,28.57 4.28,29.21 3.01,29.21 IC2.3
  Bottom 0.254: v13.17,6.34 12.22,7.3 v9.36,7.3
VUSB  (via drill 0.61)
  Top 0.254: LED2.A 60.48,10.79 60.16,11.11 60.16,13.65 JP1.10 | IC1.7 20.47,11.43 20.47,11.74 IC1.8 19.84,12.06 19.84,18.09 v18.89,19.04 | 49.05,16.82 49.05,16.66 49.37,16.35 49.37,10.79 v49.68,10.47
  Top 0.61: 49.05,23.81 L1.1 v49.05,19.36 49.05,16.82 48.41,16.19 45.87,16.19 45.26,15.57 X1.VBUS
  Bottom 0.254: v18.89,19.04 19.2,19.36 v49.05,19.36 | JP1.10 59.21,13.96 58.26,13.01 50.95,13.01 49.68,11.74 v49.68,10.47
VVI1
  Top 0.254: DAC1.24 45.87,35.56 44.6,35.56 43.97,34.92 OPFLOWCHIP.G11
VVI2  (via drill 0.61)
  Top 0.254: v48.73,36.82 47.78,36.82 DAC1.22
  Bottom 0.254: v48.73,36.82 45.24,33.33 39.84,33.33 38.89,34.29 OPFLOWCHIP.G09
VX+B  (via drill 0.61)
  Top 0.254: v10.31,20.63 10.31,13.01 11.27,12.06 IC1.17 | v7.45,23.49 6.19,24.76 6.19,32.7 7.3,33.33 v7.3,35.4 6.5,36.35 6.5,44.76 v15.07,53.02 | v41.74,53.33 44.6,50.48 44.6,48.89 43.65,47.94 OPFLOWCHIP.B11
  Bottom 0.254: v10.31,20.63 v7.45,23.49 | v7.3,35.4 10,36.82 17.3,36.82 OPFLOWCHIP.F01 | v41.74,53.33 41.43,53.02 v15.07,53.02
VY+B  (via drill 0.61)
  Top 0.254: v13.17,14.92 13.17,13.96 IC1.16 | v30,17.14 28.09,18.89 28.09,22.54 26.82,23.81 v26.82,32.38 | v46.19,49.53 v46.19,46.03 | v42.06,50.79 41.43,51.43 41.43,51.75 40.79,52.38 35.4,52.38 v35.4,51.43
  Bottom 0.254: v13.17,14.92 14.12,15.87 28.73,15.87 v30,17.14 | v26.82,32.38 25.87,33.33 25.55,33.33 | 25.55,33.33 19.52,33.33 18.57,32.38 OPFLOWCHIP.H01 | v46.19,46.03 44.92,46.03 43.97,45.08 OPFLOWCHIP.C11 | v46.19,49.53 44.6,51.11 42.38,51.11 v42.06,50.79 | v35.4,51.43 34.44,50.48 34.44,42.22 25.55,33.33

## Text on the board
Bottom: Motion18 USB | Pit Oct 2006